# EAGLE board Amplifier (EAGLE 7.2.0)
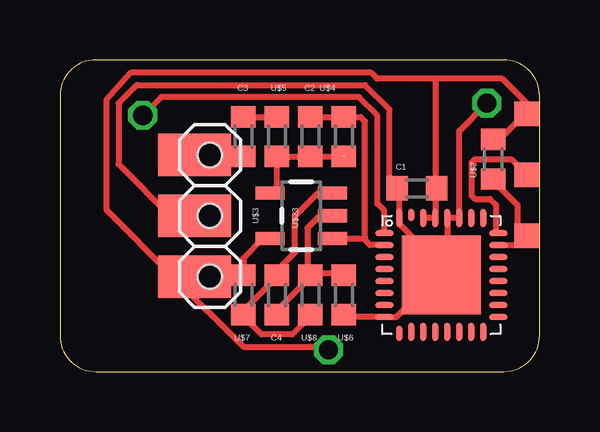
[diagram p0: board, top side]
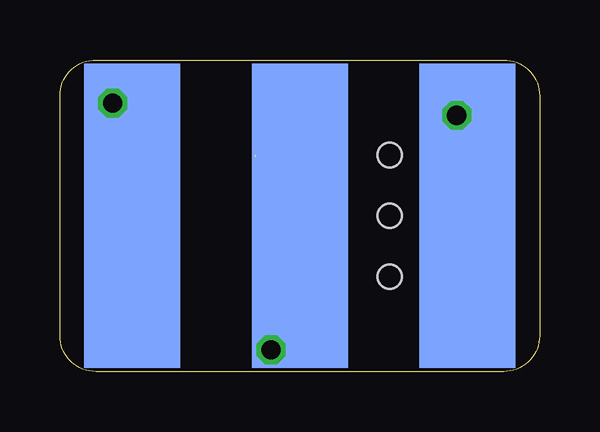
[diagram p1: board, bottom side, seen from below]

Size 20 x 13 mm. Coordinates in mm from the lower left corner, seen from the top.
Copper layers (1*16): Top 0.035mm / dielectric 1.5mm / Bottom 0.035mm
Design rules "Bilex DRU *": minimum track width 10mil, minimum drill 24mil, track to track 10mil, track to pad 10mil, pad to pad 10mil, via to via 10mil, smd to smd 10mil, copper to edge 1mil, drill to drill 8mil, minimum pad ring 10mil, minimum via ring 8mil, stop-mask expansion 4mil, vias tented up to drill 0mil, thermal gap 10mil

## Footprints (pad centres in the part's own frame; a part is rotated, then mirrored left to right if it is on the bottom)
603 = smd 0.889 x 1.016: 1 -0.826,0; 2 0.826,0
CARRIER_SMD2_3POL = smd 4 x 12.7 bottom: GND -6.985,0; RX/TX 6.985,0; VCC 0,0 | smd 1.016 x 1.016: RST -9.461,0.826; TST -9.461,-1.714; VCC'' -9.461,-4.255
PINHD_3_MOD = smd 1.778 x 3.048: P$1 -2.54,-0.635; P$2 0,-0.635; P$3 2.54,-0.635 | hole 1.016: -2.54,0; 0,0; 2.54,0
QFN32 = smd 0.762 x 0.254: 1 -2.375,1.75; 2 -2.375,1.25; 3 -2.375,0.75; 4 -2.375,0.25; 5 -2.375,-0.25; 6 -2.375,-0.75; 7 -2.375,-1.25; 8 -2.375,-1.75; 17 2.375,-1.75; 18 2.375,-1.25; 19 2.375,-0.75; 20 2.375,-0.25; 21 2.375,0.25; 22 2.375,0.75; 23 2.375,1.25; 24 2.375,1.75 | smd 0.254 x 0.635: 9 -1.75,-2.438 | smd 0.254 x 0.762: 10 -1.25,-2.375; 11 -0.75,-2.375; 12 -0.25,-2.375; 13 0.25,-2.375; 14 0.75,-2.375; 15 1.25,-2.375; 16 1.75,-2.375; 25 1.75,2.375; 26 1.25,2.375; 27 0.75,2.375; 28 0.25,2.375; 29 -0.25,2.375; 30 -0.75,2.375; 32 -1.75,2.375 | smd 0.254 x 0.508: 31 -1.25,2.5 | smd 3.302 x 3.302: TP 0,0
SOT23-5 = smd 0.55 x 1.2: 1 -0.95,-1.3; 2 0,-1.3; 3 0.95,-1.3; 4 0.95,1.3; 5 -0.95,1.3

## Placement (x,y rotation side)
C1  100n  [603]  14.89,7.64 180 top
C2  100p  [603]  10.44,9.8 90 top
C3  1µ  [603]  7.65,9.8 90 top
C4  1µ  [603]  9.04,3.2 90 top
U$1  CARRIER_SMD2SMD2_3POL  [CARRIER_SMD2_3POL]  10,6.5 180 top
U$2  10k  [603]  18.06,8.86 90 top
U$3  PINHD_32.54MOD  [PINHD_3_MOD]  6.25,6.5 270 top
U$4  100k  [603]  11.84,9.8 90 top
U$5  1.5k  [603]  9.04,9.8 270 top
U$6  2k  [603]  11.84,3.2 270 top
U$7  10k  [603]  7.65,3.2 270 top
U$8  10k  [603]  10.44,3.2 270 top
U$10  MSP430G2553  [QFN32]  15.9,4.03 0 top
U$23  OPA344  [SOT23-5]  10.06,6.5 90 top

## Library data of the parts
C1-C4 U$1-U$8 U$10 = thar
U$23 = SparkFun-AnalogIC

## Nets
GND: C1.2 U$1.GND U$3.P$2 U$6.2 U$10.8 U$10.27 U$10.28 U$10.32 U$10.TP
N$3: U$1.TST U$10.24
N$4: U$1.RST U$2.1 U$10.23
N$12: U$1.RX/TX U$10.1
N$52: C2.1 U$4.1 U$5.2 U$23.4
N$53: C3.2 U$5.1
N$55: C4.1 U$6.1 U$8.1 U$23.2
N$56: C3.1 U$3.P$1
N$57: C4.2 U$7.2 U$8.2 U$23.3
SOUND: C2.2 U$4.2 U$10.2 U$23.1
VCC: C1.1 U$1.VCC U$1.VCC'' U$2.2 U$3.P$3 U$7.1 U$10.29 U$10.30 U$23.5

## Tracks (layer width: path | path; a pad name or v marks a point on that pad's centre or on a via)
GND  (via drill 0.8)
  Top 0.254: 16.43,4.35 16.19,5.38 16.16,5.35 | 16.43,4.35 16.48,3.06 U$10.TP 15.01,2.94 14.89,3.14 14.03,2.28 U$10.8 12.18,2.28 | 16.15,4.72 U$10.28 U$10.27 16.65,10.04 v17.81,11.2 | 16.15,4.72 16.15,4.42 16.43,4.35 | 16.15,4.72 15.52,5.35 14.76,5.55 14.15,6.16 U$10.32 14.15,7.36 14,7.59 14.12,7.58 C1.2 14,7.7 14,7.77 13.74,7.77 13.74,10.94 12.73,11.96 3.2,11.96 2.44,11.2 2.44,8.66 4.73,6.37 U$3.P$2 | 11.59,2.28 12.18,2.28 | 12.18,2.28 U$6.2
  Bottom 0.254: 18,6.5 17.81,6.69 v17.81,11.2 16.98,10.37 U$1.GND
N$3
  Top 0.254: 19.61,7.88 19.46,8.02 19.5,8.18 | U$10.24 18.19,5.78 18.19,6.95 17.93,7.21 17.3,7.21 17.17,7.33 17.17,8.73 17.3,8.86 18.82,8.86 19.5,8.18 | 19.5,8.18 U$1.TST
N$4
  Top 0.254: 19.46,5.48 19.5,5.38 | 19.46,5.48 19.5,5.69 19.08,5.74 19.08,6.95 18.06,7.97 U$2.1 | U$10.23 19.28,5.28 19.46,5.48 | U$1.RST 19.46,5.48
N$12  (via drill 0.8)
  Top 0.254: U$10.1 13.53,6.71 13.24,7.01 13.24,10.69 12.47,11.45 4.22,11.45 v3.46,10.69
  Bottom 0.254: 2.51,7.9 2.7,7.89 | 2.7,7.89 2.82,7.89 v3.46,10.69 | U$1.RX/TX 3.01,7.58 2.7,7.89
N$52  (1 unrouted)
  Top 0.254: 11.84,9.04 11.84,8.78 | U$4.1 C2.1 U$5.2 9.04,7.51 8.98,7.45 U$23.4
N$53
  Top 0.254: C3.2 U$5.1
N$55
  Top 0.254: U$23.2 10.82,6.5 10.31,5.99 10.31,3.96 10.38,4.02 U$8.1 | U$6.1 11.71,4.08 10.63,4.08 U$8.1 | U$8.1 10.44,3.96 9.04,2.56 C4.1
N$56
  Top 0.254: C3.1 5.81,8.72 U$3.P$1
N$57
  Top 0.254: U$23.3 10.76,7.45 9.93,6.62 9.81,6.5 9.81,4.97 9.04,4.21 C4.2 9.04,3.96 7.65,2.56 U$7.2 7.65,2.31 8.41,1.54 9.68,1.54 10.44,2.31 U$8.2
SOUND
  Top 0.254: U$10.2 12.93,5.28 12.73,5.48 12.73,5.61 | 12.73,5.61 12.73,10.43 12.54,10.62 U$4.2 C2.2 | U$23.1 12.67,5.55 12.73,5.61
VCC  (via drill 0.8)
  Top 0.254: U$10.29 | 15.65,12.21 15.65,8.02 | 15.65,8.02 U$10.29 | 15.78,7.77 15.71,8.02 | 15.71,8.02 15.65,8.02 | U$10.29 U$10.30 | C1.1 15.71,8.02 | 19.5,10.52 19.46,10.56 | U$2.2 18.12,9.48 19.2,10.56 19.2,10.51 19.46,10.56 | 19.46,10.56 19.65,10.75 19.65,11.01 18.44,12.21 15.65,12.21 | 19.46,10.56 U$1.VCC'' | 4.73,3.96 1.93,6.75 1.93,11.32 2.95,12.47 12.98,12.47 13.24,12.21 15.65,12.21 | 4.73,3.96 U$3.P$3 6.06,4.27 U$7.1 7.65,4.72 8.48,5.55 U$23.5 | 4.73,3.96 7.65,1.04 11.08,1.04 v11.2,0.91
  Bottom 0.254: U$1.VCC 10.38,8.09 v11.2,0.91